# Altium PCB LTC6803-3.PcbDoc
Units mil, origin at the board's own origin, x right, y up, seen from the top; angles counter-clockwise.
Board outline 3525 x 2945 mil, 2 copper layers (Top Layer, Bottom Layer); 143 components, 115 nets, 357 pads, 26 vias.
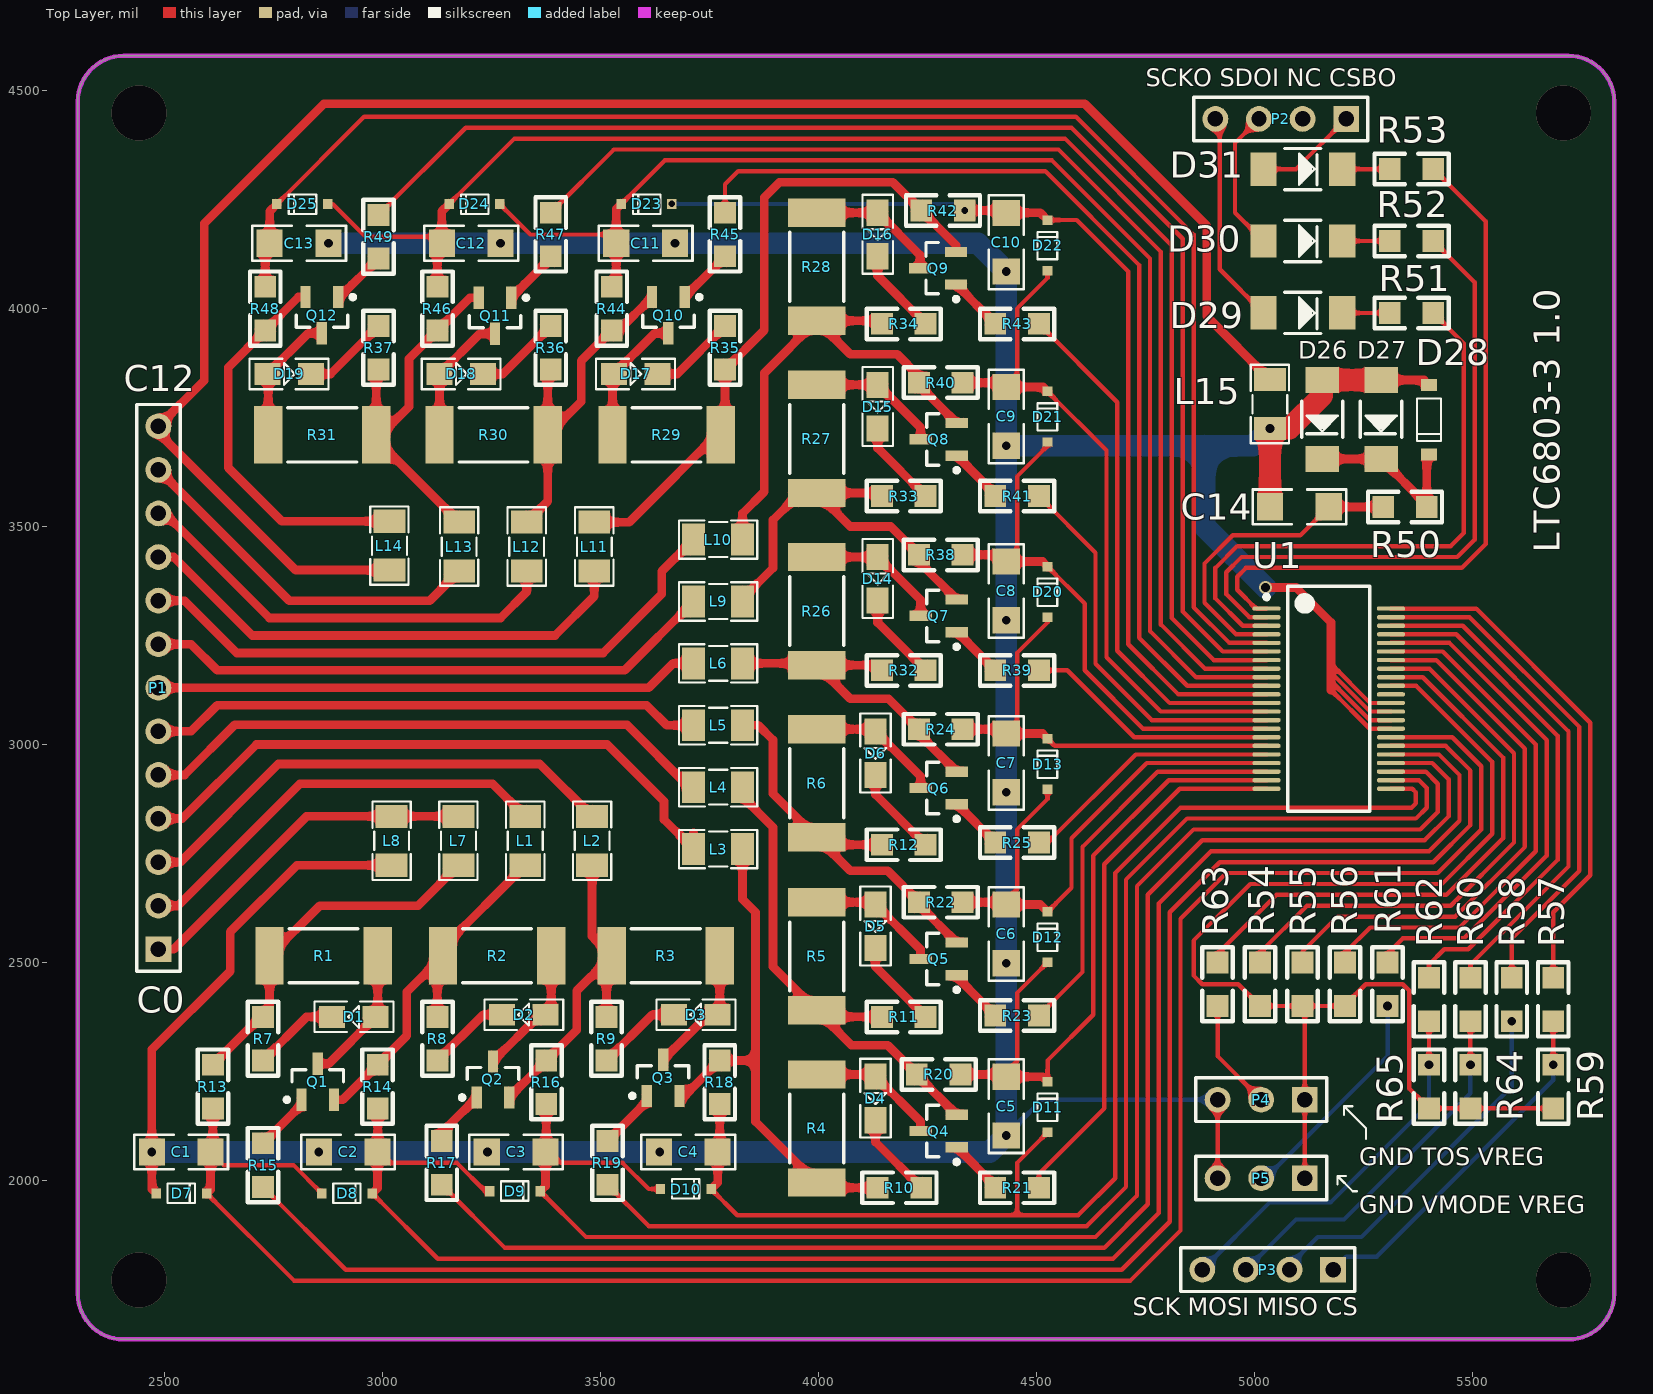
[diagram p0: Top Layer view]
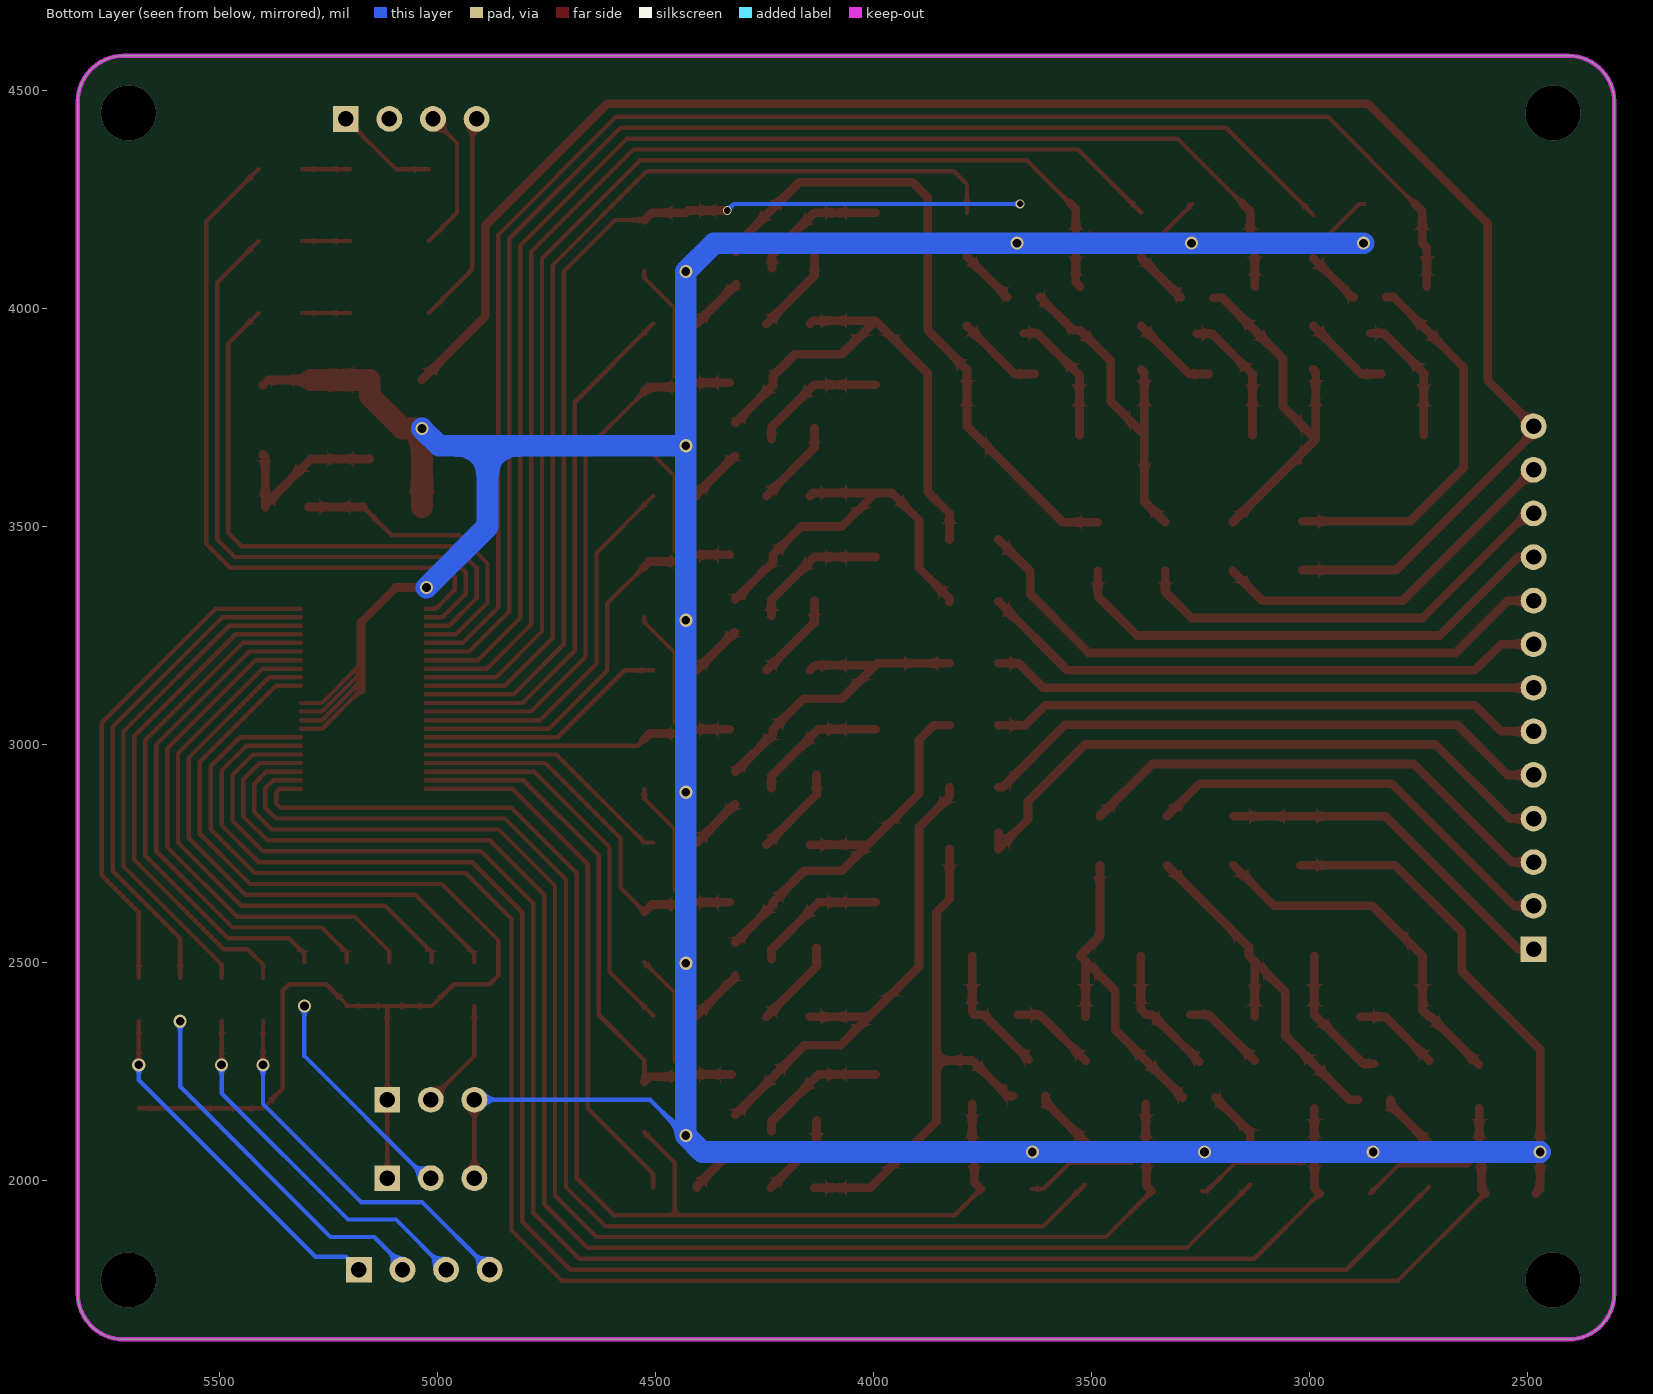
[diagram p1: Bottom Layer view, seen from below]

## Layer stack, top to bottom
Top Solder: solder mask 0.4, Solder Resist, Dk 3.5
Top Layer: signal copper 1.4
Dielectric 1: dielectric 12.6, FR-4, Dk 4.8
Bottom Layer: signal copper 1.4
Bottom Solder: solder mask 0.4, Solder Resist, Dk 3.5

## Board outline
2300,1740 2300,4475 cw(c2405,4475) 2405,4580 5720,4580 cw(c5720,4475) 5825,4475 5825,1740 cw(c5720,1740) 5720,1635 2405,1635 cw(c2405,1740)

## Design rules (kind name [scope] priority, off if disabled: settings)
Clearance [All] p1: gap=5
PolygonConnect [All] p1: connectstyle=Relief reliefconductorwidth=10 reliefentries=4 polygonreliefangle="90 Angle" airgapwidth=10
RoutingVias [All] p1: holewidth=28 width=50 viastyle="Through Hole" minholewidth=28 minwidth=50 maxholewidth=28 maxwidth=50
SolderMaskExpansion [All] p1: expansion=4
Width [All] p1: maxlimit=50 minlimit=5 preferedwidth=10
30 further rules are at their usual default settings.

## Components (designator, comment, footprint, x,y, rotation, side; value= is the part's Value field where it differs from the comment)
C1 "Cap" 1206 2604.65,2065 r180 top
C2 "Cap" 1206 2987.65,2065 r180 top
C3 "Cap" 1206 3373,2065 r180 top
C4 "Cap" 1206 3768,2065 r180 top
C5 "Cap" 1206 4430,2237.65 r270 top
C6 "Cap" 1206 4430,2632.65 r270 top
C7 "Cap" 1206 4430,3025 r270 top
C8 "Cap" 1206 4430,3419.65 r270 top
C9 "Cap" 1206 4430,3820 r270 top
C10 "Cap" 1206 4430,4219.65 r270 top
C11 "Cap" 1206 3535.35,4150 r0 top
C12 "Cap" 1206 3135.35,4150 r0 top
C13 "Cap" 1206 2740.35,4150 r0 top
C14 "Cap" 1206 5035.35,3545 r0 top
D1 "LED" LED_0805 2983,2375 r180 top
D2 "LED" LED_0805 3373,2380 r180 top
D3 "LED" LED_0805 3768,2380 r180 top
D4 "LED" LED_0805 4130,2238 r270 top
D5 "LED" LED_0805 4130,2633 r270 top
D6 "LED" LED_0805 4130,3030 r270 top
D7 "PDZ7.5B" SODFL250X110-2N 2538,1970 r0 top
D8 "PDZ7.5B" SODFL250X110-2N 2918,1970 r0 top
D9 "PDZ7.5B" SODFL250X110-2N 3303,1975 r0 top
D10 "PDZ7.5B" SODFL250X110-2N 3695,1980 r0 top
D11 "PDZ7.5B" SODFL250X110-2N 4525,2168 r90 top
D12 "PDZ7.5B" SODFL250X110-2N 4525,2558 r90 top
D13 "PDZ7.5B" SODFL250X110-2N 4525,2955 r90 top
D14 "LED" LED_0805 4135,3430 r270 top
D15 "LED" LED_0805 4135,3825 r270 top
D16 "LED" LED_0805 4135,4220 r270 top
D17 "LED" LED_0805 3530,3850 r0 top
D18 "LED" LED_0805 3130,3850 r0 top
D19 "LED" LED_0805 2735,3850 r0 top
D20 "PDZ7.5B" SODFL250X110-2N 4525,3350 r90 top
D21 "PDZ7.5B" SODFL250X110-2N 4525,3751.93 r90 top
D22 "PDZ7.5B" SODFL250X110-2N 4525,4145 r90 top
D23 "PDZ7.5B" SODFL250X110-2N 3605,4240 r180 top
D24 "PDZ7.5B" SODFL250X110-2N 3210,4240 r180 top
D25 "PDZ7.5B" SODFL250X110-2N 2815,4240 r180 top
D26 "FR107" DIO-214 5155,3836.1 r270 top
D27 "FR107" DIO-214 5290,3836.1 r270 top
D28 "CMHZ5265B" SODFL372X135-2N 5400,3745 r270 top
D29 "FR107" DIO-214 5020,3990 r0 top
D30 "FR107" DIO-214 5020,4155 r0 top
D31 "FR107" DIO-214 5020,4320 r0 top
L1 "Inductor" 0805_Inductor 3326.67,2722.8 r90 top
L2 "Inductor" 0805_Inductor 3480,2722.8 r90 top
L3 "Inductor" 0805_Inductor 3825,2760 r180 top
L4 "Inductor" 0805_Inductor 3825,2902 r180 top
L5 "Inductor" 0805_Inductor 3825,3044 r180 top
L6 "Inductor" 0805_Inductor 3825,3186 r180 top
L7 "Inductor" 0805_Inductor 3173.33,2835 r270 top
L8 "Inductor" 0805_Inductor 3020,2835 r270 top
L9 "Inductor" 0805_Inductor 3825,3328 r180 top
L10 "Inductor" 0805_Inductor 3825,3470 r180 top
L11 "Inductor" 0805_Inductor 3485,3510 r270 top
L12 "Inductor" 0805_Inductor 3330,3510 r270 top
L13 "Inductor" 0805_Inductor 3175,3510 r270 top
L14 "Inductor" 0805_Inductor 3015,3512.2 r270 top
L15 "Inductor" 0805_Inductor 5035,3725 r90 top
P1 "Header 13" HDR1X13 2485,2530 r90 top
P2 "Header 4" HDR1X4 5210,4435 r180 top
P3 "Header 4" HDR1X4 5180,1795 r180 top
P4 "Header 3" HDR1X3 5115,2185 r180 top
P5 "Header 3" HDR1X3 5115,2005 r180 top
Q1 "MOS-P" SOT23_N 2850.6,2226.34 r90 top
Q2 "MOS-P" SOT23_N 3252.6,2231.34 r90 top
Q3 "MOS-P" SOT23_N 3643,2235 r90 top
Q4 "MOS-P" SOT23_N 4275,2113 r180 top
Q5 "MOS-P" SOT23_N 4275,2508 r180 top
Q6 "MOS-P" SOT23_N 4275,2900 r180 top
Q7 "MOS-P" SOT23_N 4275,3295 r180 top
Q8 "MOS-P" SOT23_N 4275,3700 r180 top
Q9 "MOS-P" SOT23_N 4273.66,4092.6 r180 top
Q10 "MOS-P" SOT23_N 3655,3985 r270 top
Q11 "MOS-P" SOT23_N 3257.4,3983.66 r270 top
Q12 "MOS-P" SOT23_N 2860,3985 r270 top
R1 "Res" 2512-RESC6332X06N 2739.97,2515 r0 top
R2 "Res" 2512-RESC6332X06N 3138,2515 r0 top
R3 "Res" 2512-RESC6332X06N 3524.97,2515 r0 top
R4 "Res" 2512-RESC6332X06N 3995,1994.97 r90 top
R5 "Res" 2512-RESC6332X06N 3995,2389.97 r90 top
R6 "Res" 2512-RESC6332X06N 3995,2786.97 r90 top
R7 "Res" 0805 2725,2375 r270 top
R8 "Res" 0805 3125,2375 r270 top
R9 "Res" 0805 3513,2375 r270 top
R10 "Res" 0805 4135,1983 r0 top
R11 "Res" 0805 4145,2375 r0 top
R12 "Res" 0805 4145,2770 r0 top
R13 "Res" 0805 2610,2265 r270 top
R14 "Res" 0805 2988,2265 r270 top
R15 "Res" 0805 2725,2085 r270 top
R16 "Res" 0805 3375,2275 r270 top
R17 "Res" 0805 3135,2090 r270 top
R18 "Res" 0805 3773,2275 r270 top
R19 "Res" 0805 3515,2090 r270 top
R20 "Res" 0805 4225,2243 r0 top
R21 "Res" 0805 4405,1983 r0 top
R22 "Res" 0805 4230,2638 r0 top
R23 "Res" 0805 4405,2378 r0 top
R24 "Res" 0805 4230,3035 r0 top
R25 "Res" 0805 4405,2775 r0 top
R26 "Res" 2512-RESC6332X06N 3995,3181.97 r90 top
R27 "Res" 2512-RESC6332X06N 3995,3576.97 r90 top
R28 "Res" 2512-RESC6332X06N 3995,3971.97 r90 top
R29 "Res" 2512-RESC6332X06N 3775,3710 r180 top
R30 "Res" 2512-RESC6332X06N 3378.03,3710 r180 top
R31 "Res" 2512-RESC6332X06N 2985,3710 r180 top
R32 "Res" 0805 4145,3170 r0 top
R33 "Res" 0805 4145,3570 r0 top
R34 "Res" 0805 4145,3965 r0 top
R35 "Res" 0805 3785,3860 r90 top
R36 "Res" 0805 3385,3860 r90 top
R37 "Res" 0805 2990,3860 r90 top
R38 "Res" 0805 4230,3435 r0 top
R39 "Res" 0805 4405,3170 r0 top
R40 "Res" 0805 4230,3830 r0 top
R41 "Res" 0805 4405,3570 r0 top
R42 "Res" 0805 4235,4225 r0 top
R43 "Res" 0805 4405,3965 r0 top
R44 "Res" 0805 3525,3950 r90 top
R45 "Res" 0805 3785,4120 r90 top
R46 "Res" 0805 3125,3950 r90 top
R47 "Res" 0805 3385,4120 r90 top
R48 "Res" 0805 2730,3950 r90 top
R49 "Res" 0805 2990,4115 r90 top
R50 "Res" 0805 5295,3545 r0 top
R51 "Res" 0805 5410,3990 r180 top
R52 "Res" 0805 5410,4155 r180 top
R53 "Res" 0805 5410,4320 r180 top
R54 "Res" 0805 5012.5,2400 r90 top
R55 "Res" 0805 5110,2400 r90 top
R56 "Res" 0805 5207.5,2400 r90 top
R57 "Res" 0805 5685,2365 r90 top
R58 "Res" 0805 5590,2365 r90 top
R59 "Res" 0805 5685,2165 r90 top
R60 "Res" 0805 5495,2365 r90 top
R61 "Res" 0805 5305,2400 r90 top
R62 "Res" 0805 5400,2365 r90 top
R63 "Res" 0805 4915,2400 r90 top
R64 "Res" 0805 5495,2165 r90 top
R65 "Res" 0805 5400,2165 r90 top
U1 "LTC6803-3" SSOP50P780X200-44N 5170,3105 r0 top

## Footprints (in the part's own frame and the unit in brackets; to place one, negate y for a bottom-side part, rotate by r counter-clockwise, add the part's x,y. Pads: shape width x height; smd on the part's side, far side on the other; paste and mask are expansions set on the pad)
0805 [mil] "Chip Capacitor, 2-Leads, Body 2.0x1.3mm, IPC Medium Density"
  rect 50x50 smd: 1(0,0) 2(100,0)
  silkscreen extent -35,-35 135,35
0805_Inductor [mm]
  rect 1.35x1.85 smd: 1(0,0) 2(2.85,0)
  silkscreen extent -0.86,-1.12 3.71,1.12
1206 [mm]
  rect 1.52x1.6 smd: 1(0,0) 2(3.42,0)
  silkscreen extent -1.02,-1.02 4.44,1.02
2512-RESC6332X06N [mm] "Chip Resistor, 2-Leads, Body 6.3x3.2mm, IPC Medium Density"
  rect 1.65x3.35 smd: 1(0,0) 2(6.3,0)
  silkscreen extent 1.15,-1.58 5.15,1.58, body extent -0.02,-1.6 6.33,1.6, height 0.65
DIO-214 [mm] "Diode"
  rect 1.524x1.95 smd: 1(0,0) 2(4.6,0)
  silkscreen extent 1.25,-1.2 3.35,1.2, body extent 0.18,-1.2 4.42,1.19, height 3
HDR1X3 [mm] "Connector; Header; 3 Position"
  rect 1.5x1.5 hole 0.9: 1(0,0)
  round 1.5 hole 0.9: 2(2.54,0) 3(5.08,0)
  silkscreen extent -1.27,-1.27 6.35,1.27
HDR1X4 [mm] "Connector; Header; 4 Position"
  rect 1.5x1.5 hole 0.9: 1(0,0)
  round 1.5 hole 0.9: 2(2.54,0) 3(5.08,0) 4(7.62,0)
  silkscreen extent -1.27,-1.27 8.89,1.27
HDR1X13 [mm] "Connector; Header; 13 Position"
  rect 1.5x1.5 hole 0.9: 1(0,0)
  round 1.5 hole 0.9: 2(2.54,0) 3(5.08,0) 4(7.62,0) 5(10.16,0) 6(12.7,0) 7(15.24,0) 8(17.78,0) 9(20.32,0) 10(22.86,0) 11(25.4,0) 12(27.94,0) 13(30.48,0)
  silkscreen extent -1.27,-1.27 31.75,1.27
LED_0805 [mil]
  rect 60x50 smd: 1(0,0) 2(100,0)
  silkscreen extent -41,-35 140,35
SODFL250X110-2N [mm] "SODFL, 2-Leads, Body 1.25x2.50mm, IPC Medium Density"
  rect 0.55x0.6 smd: 1(-1.475,0) 2(1.475,0)
  silkscreen extent -0.81,-0.56 0.79,0.58, body extent -0.8,-0.58 0.8,0.58, height 1.1
SODFL372X135-2N [mm] "SODFL, 2-Leads, Body 1.60x3.72mm, IPC Medium Density"
  rect 0.7x0.95 smd: 1(-2.025,0) 2(2.025,0)
  silkscreen extent -1.24,-0.69 1.24,0.71, body extent -1.25,-0.7 1.25,0.7, height 1.35
SOT23_N [mm] "SOT23, 3-Leads, Body 2.9x1.3mm, Pitch 0.95mm, Lead Span 2.3mm, IPC Medium Density"
  rect 1.3x0.6 smd: 1(-1.05,0.95) 2(1.05,0) 3(-1.05,-0.95)
  silkscreen extent -1.17,-1.5 0.7,1.92, body extent -0.7,-1.5 0.7,1.5, height 1.1
SSOP50P780X200-44N [mm] "SSOP, 44-Leads, Body 12.80x5.30mm, Pitch 0.50mm, IPC Medium Density"
  oval 1.65x0.25 smd: 1(-3.625,5.25) 2(-3.625,4.75) 3(-3.625,4.25) 4(-3.625,3.75) 5(-3.625,3.25) 6(-3.625,2.75) 7(-3.625,2.25) 8(-3.625,1.75) 9(-3.625,1.25) 10(-3.625,0.75) 11(-3.625,0.25) 12(-3.625,-0.25) 13(-3.625,-0.75) 14(-3.625,-1.25) 15(-3.625,-1.75) 16(-3.625,-2.25) 17(-3.625,-2.75) 18(-3.625,-3.25) 19(-3.625,-3.75) 20(-3.625,-4.25) 21(-3.625,-4.75) 22(-3.625,-5.25) 23(3.625,-5.25) 24(3.625,-4.75) 25(3.625,-4.25) 26(3.625,-3.75) 27(3.625,-3.25) 28(3.625,-2.75) 29(3.625,-2.25) 30(3.625,-1.75) 31(3.625,-1.25) 32(3.625,-0.75) 33(3.625,-0.25) 34(3.625,0.25) 35(3.625,0.75) 36(3.625,1.25) 37(3.625,1.75) 38(3.625,2.25) 39(3.625,2.75) 40(3.625,3.25) 41(3.625,3.75) 42(3.625,4.25) 43(3.625,4.75) 44(3.625,5.25)
  silkscreen extent -3.75,-6.55 2.4,6.55, body extent -2.8,-6.55 2.8,6.55, height 2

## Part data
D26 D27 D29 D30 D31: library part 二极管
D28: "62V Zener Diode"
P1: "Header, 13-Pin"
P2 P3: "Header, 4-Pin"
P4 P5: "Header, 3-Pin"

## Via types
v1: diameter 30, hole 20, Top Layer to Bottom Layer, 20 vias
v2: diameter 125.98, hole 125.98, Top Layer to Bottom Layer, 4 vias
v3: diameter 20, hole 15, Top Layer to Bottom Layer, 2 vias

## Nets (pads, with @x,y where several pads share a name; then routed paths per layer and width w, separated by ;. In a path a pad name is that pad's centre, name@x,y a point inside that pad or via, vN(x,y) a via of type N, cw(c..) or ccw(c..) an arc to the next point about the centre after c; other vN are vias at no path point)
C0FILTER: C1.1 D7.2 D8.1 R13.2 U1.29 | length 4729.5
  Top Layer w10: D7.2 2796.07,1770 4715,1770 4830,1885 4830,2600 4935,2705 5420,2705 5520,2805 5520,2950 5453.58,3016.42 U1.29 ; C1.1 2634.65,2035 2794.93,2035 D8.1
  Top Layer w20: D7.2 2604.65,1978.57 C1.1 2610,2070.35 R13.2
C1FILTER: C2.1 D8.2 D9.1 R14.2 U1.27 | length 4164.5
  Top Layer w10: D8.2 3126.07,1820 4675,1820 4780,1925 4780,2635 4900,2755 5400,2755 5470,2825 5470,2930 5422.95,2977.05 U1.27 ; C2.1 3012.65,2040 3170,2040 3235,1975 D9.1
  Top Layer w20: D8.2 2987.65,1981.57 C2.1 2988,2065.35 R14.2
C2FILTER: C3.1 D9.2 D10.1 R16.2 U1.25 | length 3615
  Top Layer w10: D9.2 3466.07,1870 4635,1870 4730,1965 4730,2675 4860,2805 5380,2805 5420,2845 5420,2910 5392.32,2937.68 U1.25 ; C3.1@3373,2075 3408,2040 3550,2040 3610,1980 D10.1
  Top Layer w20: D9.2 3373,1986.93 C3.1 3373,2075 3375,2077 R16.2
C3FILTER: C4.1 D10.2 D11.1 R18.2 U1.23 | length 2951.2
  Top Layer w10: D10.2 3813.07,1920 4455,1920 ; D11.1 4455,2039.93 4455,1920 ; U1.23 5361.69,2898.31 5370,2890 5370,2865 5360,2855 4830,2855 4680,2705 4680,2005 4595,1920 4455,1920
  Top Layer w20: D10.2 3768,1994.93 C4.1 3768,2075 3773,2080 R18.2
C4FILTER: C5.1 D11.2 D12.1 R20.2 U1.21 | length 1536.9
  Top Layer w10: C5.1@4424.65,2243 4455,2273.35 4455,2429.93 D12.1 ; D11.2 4525,2275 4630,2380 4630,2745 4802.99,2917.99 U1.21
  Top Layer w20: R20.2 4424.65,2243 C5.1 4513.43,2237.65 D11.2
C5FILTER: C6.1 D12.2 D13.1 R22.2 U1.19 | length 1215
  Top Layer w10: C6.1@4424.65,2638 4455,2668.35 4455,2805 4525,2875 D13.1 ; D12.2 4580,2671.07 4580,2785 4752.36,2957.36 U1.19
  Top Layer w20: R22.2 4424.65,2638 C6.1 4508.43,2632.65 D12.2
C6FILTER: C7.1 D13.2 D20.1 R24.2 U1.17 | length 1019.4
  Top Layer w10: C7.1 4455,3050 4455,3210 4525,3280 D20.1 ; D13.2 4541.34,2996.73 U1.17
  Top Layer w20: R24.2 4420,3035 C7.1 4513.07,3025 D13.2
C7FILTER: C8.1 D20.2 D21.1 R38.2 U1.15 | length 1265.7
  Top Layer w10: C8.1 4455,3444.65 4455,3615 4525,3685 D21.1 ; D20.2 4610,3323.07 4610,3170 4743.9,3036.1 U1.15
  Top Layer w20: R38.2 4414.65,3435 C8.1 4513.43,3419.65 D20.2
C8FILTER: C9.1 D21.2 D22.1 R40.2 U1.13 | length 1594.3
  Top Layer w10: C9.1 4455,3845 4455,4000 4525,4070 D22.1 ; D21.2 4660,3675 4660,3200 4784.53,3075.47 U1.13
  Top Layer w20: R40.2 4420,3830 C9.1 4515,3820 D21.2
C9FILTER: C10.1 D22.2 D23.1 R42.2 U1.11 | length 2331.1
  Top Layer w10: D22.2 4591.93,4203.07 4710,4085 4710,3230 4825.16,3114.84 U1.11
  Top Layer w20: v3(4335,4225) 4424.65,4225 C10.1 4508.43,4219.65 D22.2
  Bottom Layer w10: v3(3663.07,4240) 4320,4240 v3(4335,4225)
C10FILTER: C11.1 D23.2 D24.1 R44.2 U1.9 | length 3017.4
  Top Layer w10: D24.1 3338.07,4170 3515.35,4170 C11.1 ; D23.2 3646.93,4340 4535,4340 4760,4115 4760,3260 4865.79,3154.21 U1.9
  Top Layer w20: R44.2 3535.35,4060.35 C11.1 3535.35,4228.43 D23.2
C11FILTER: C12.1 D24.2 D25.1 R46.2 U1.7 | length 3434.6
  Top Layer w10: D25.1 2885,4240 2960,4165 3120.35,4165 C12.1 ; D24.2 3301.93,4390 4565,4390 4810,4145 4810,3290 4906.42,3193.58 U1.7
  Top Layer w20: R46.2 3125,4139.65 C12.1 3135.35,4223.43 D24.2
C12FILTER: C13.1 D25.2 R48.2 U1.5 | length 3555.2
  Top Layer w10: D25.2 2956.93,4440 4590,4440 4860,4170 4860,3315 4942.05,3232.95 U1.5
  Top Layer w20: R48.2 2730,4139.65 C13.1 2740.35,4223.43 D25.2
CELL0: L7.1 L8.1 P1.1 | length 814.7
  Top Layer w20: P1.1 2520,2530 2825,2835 L8.1 L7.1
CELL1: L1.2 P1.2 | length 988.7
  Top Layer w20: P1.2 2530,2630 2810,2910 3251.67,2910 L1.2
CELL2: L2.2 P1.3 | length 1137.9
  Top Layer w20: P1.3 2535,2730 2760,2955 3360,2955 L2.2
CELL3: L3.2 P1.4 | length 1459.6
  Top Layer w20: P1.4 2540,2830 2710,3000 3515,3000 3645,2870 3645,2827.8 L3.2 3712.8,2797.2
CELL4: L4.2 P1.5 | length 1334.7
  Top Layer w20: P1.5 2545,2930 2660,3045 3560,3045 3703,2902 L4.2
CELL5: L5.2 P1.6 | length 1271.7
  Top Layer w20: P1.6 2560,3030 2620,3090 3605,3090 3651,3044 L5.2
CELL6: L6.2 P1.7 | length 1251
  Top Layer w20: P1.7 3610,3130 3666,3186 L6.2
CELL7: L9.2 P1.8 | length 1318.1
  Top Layer w20: P1.8 2560,3230 2620,3170 3554.8,3170 L9.2
CELL8: L10.2 P1.9 | length 1415.8
  Top Layer w20: P1.9 2545,3330 2665,3210 3505,3210 3640,3345 3640,3397.2 L10.2
CELL9: L11.2 P1.10 | length 1169.6
  Top Layer w20: P1.10 2520,3430 2700,3250 3395,3250 3485,3340 L11.2
CELL10: L12.2 P1.11 | length 1017.1
  Top Layer w20: P1.11 2500,3530 2740,3290 3270,3290 3330,3350 L12.2
CELL11: L13.2 P1.12 | length 842.3
  Top Layer w20: P1.12 2785,3330 3107.2,3330 L13.2
CELL12: L14.2 L15.2 P1.13 | length 4126.7
  Top Layer w20: L14.2 2800,3400 2485,3715 P1.13 2590,3835 2590,4195 2865,4470 4610,4470 4890,4190 4890,3982.2 L15.2
CS: P3.1 R57.1 R59.2 | length 820.2
  Top Layer w10: v1(5685,2265) R57.1
  Bottom Layer w10: P3.1 5210,1825 5280,1825 5685,2230 v1(5685,2265)
CSBO: D31.1 P2.1 | length 237.6
  Top Layer w10: D31.1 5095,4320 P2.1
DC1: R15.2 U1.28 | length 4017.9
  Top Layer w10: R15.2 2915,1795 4695,1795 4805,1905 4805,2615 4920,2730 5410,2730 5495,2815 5495,2940 5438.27,2996.73 U1.28
DC2: R17.2 U1.26 | length 3428.8
  Top Layer w10: R17.2 3280,1845 4655,1845 4755,1945 4755,2655 4880,2780 5390,2780 5445,2835 5445,2920 5407.64,2957.36 U1.26
DC3: R19.2 U1.24 | length 2864.7
  Top Layer w10: R19.2 3610,1895 4615,1895 4705,1985 4705,2690 4845,2830 5370,2830 5395,2855 5395,2900 5377.01,2917.99 U1.24
DC4: R21.2 U1.22 | length 1248.2
  Top Layer w10: R21.2 4505,2015 4655,2165 4655,2725 4828.31,2898.31 U1.22
DC5: R23.2 U1.20 | length 922.2
  Top Layer w10: R23.2 4605,2478 4605,2765 4777.68,2937.68 U1.20
DC6: R25.2 U1.18 | length 606
  Top Layer w10: R25.2 4525,2775 4727.05,2977.05 U1.18
DC7: R39.2 U1.16 | length 585.9
  Top Layer w10: R39.2 4570,3170 4723.58,3016.42 U1.16
DC8: R41.2 U1.14 | length 884.7
  Top Layer w10: R41.2 4635,3440 4635,3185 4764.21,3055.79 U1.14
DC9: R43.2 U1.12 | length 1216.5
  Top Layer w10: R43.2 4685,3785 4685,3215 4804.84,3095.16 U1.12
DC10: R45.2 U1.10 | length 2309.5
  Top Layer w10: R45.2 3785,4285 3815,4315 4520,4315 4735,4100 4735,3245 4845.47,3134.53 U1.10
DC11: R47.2 U1.8 | length 2696.6
  Top Layer w10: R47.2 3530,4365 4550,4365 4785,4130 4785,3275 4886.1,3173.9 U1.8
DC12: R49.2 U1.6 | length 3118.7
  Top Layer w10: R49.2 3190,4415 4580,4415 4835,4160 4835,3305 4926.73,3213.27 U1.6
GND: C1.2 C2.2 C3.2 C4.2 C5.2 C6.2 C7.2 C8.2 C9.2 C10.2 C11.2 C12.2 C13.2 C14.1 D7.1 D26.1 D27.1 D28.1 L8.2 L15.1 P4.3 P5.3 U1.30 U1.31 U1.32 U1.33 | length 10006.1
  Top Layer w10: P5.3 P4.3 ; 5175,3125 5263.9,3036.1 U1.30 ; 5175,3145 5264.21,3055.79 U1.31 ; 5175,3185 5264.84,3095.16 U1.33 ; 5177.5,3162.5 5264.53,3075.47 U1.32
  Top Layer w20: D7.1 2470,1979.93 v1(2470,2065) 2470,2300 2650,2480 2650,2570 2802.8,2722.8 L8.2 ; v1(5025,3360) 5095,3360 5175,3280 5175,3185 5175,3145 5175,3125 ; D27.1 5388.62,3836.1 D28.1
  Top Layer w50: C14.1 5035.35,3724.65 v1(5035,3725) 5080,3725 5155,3800 D26.1 D27.1
  Bottom Layer w10: v1(4430,2103) 4512,2185 P4.3
  Bottom Layer w50: v1(2470,2065) v1(2853,2065) v1(3240,2065) v1(3635,2065) 4392,2065 v1(4430,2103) v1(4430,2498) v1(4430,2890.35) v1(4430,3285) v1(4430,3685.35) ; v1(2875,4150) v1(3270,4150) v1(3670,4150) 4365,4150 v1(4430,4085) v1(4430,3685.35) ; v1(5025,3360) 4885,3500 4885,3685.35 ; v1@5035.35,3724.65 4996.06,3685.35 4885,3685.35 ; v1(4430,3685.35) 4885,3685.35
MISO: P3.2 R58.1 | length 839.8
  Bottom Layer w10: P3.2 5080,1805 5145,1870 5245,1870 5590,2215 v1(5590,2365)
MOSI: P3.3 R60.1 R64.2 | length 847.8
  Top Layer w10: v1(5495,2265) R60.1
  Bottom Layer w10: P3.3 5095,1910 5205,1910 5495,2200 v1(5495,2265)
NetC14_2: C14.2 R50.1 U1.4 | length 726.1
  Top Layer w10: U1.4 4957.36,3252.64 4885,3325 4885,3415 4950,3480 5105,3480 C14.2
  Top Layer w20: C14.2 R50.1
NetD1_1: D1.1 Q1.2 R1.2 | length 318.9
  Top Layer w20: Q1.2 2875.68,2267.68 D1.1 2988,2380 R1.2
NetD1_2: D1.2 R7.2 | length 199.4
  Top Layer w20: R7.2 2825,2375 D1.2
NetD2_1: D2.1 Q2.2 R2.2 | length 305.3
  Top Layer w20: Q2.2 3359.92,2380 D2.1 3386.03,2393.03 R2.2
NetD2_2: D2.2 R8.2 | length 191.5
  Top Layer w20: R8.2 3230,2380 D2.2
NetD3_1: D3.1 Q3.2 R3.2 | length 305
  Top Layer w20: Q3.2 3746.66,2380 D3.1 3773,2385 R3.2
NetD3_2: D3.2 R9.2 | length 198.5
  Top Layer w20: R9.2 3618,2380 D3.2
NetD4_1: D4.1 Q4.2 R4.2 | length 305
  Top Layer w20: R4.2 4125,2243 D4.1 4233.66,2134.34 Q4.2
NetD4_2: D4.2 R10.2 | length 198.5
  Top Layer w20: D4.2 4130,2088 R10.2
NetD5_1: D5.1 Q5.2 R5.2 | length 305
  Top Layer w20: R5.2 4125,2638 D5.1 4233.66,2529.34 Q5.2
NetD5_2: D5.2 R11.2 | length 205.6
  Top Layer w20: D5.2 4130,2490 R11.2
NetD6_1: D6.1 Q6.2 R6.2 | length 310
  Top Layer w20: R6.2 4125,3035 D6.1 4233.66,2926.34 Q6.2
NetD6_2: D6.2 R12.2 | length 207.6
  Top Layer w20: D6.2 4130,2885 R12.2
NetD14_1: D14.1 Q7.2 R26.2 | length 315.9
  Top Layer w20: R26.2 D14.1 4233.66,3331.34 Q7.2
NetD14_2: D14.2 R32.2 | length 205.6
  Top Layer w20: D14.2 4135,3280 R32.2
NetD15_1: D15.1 Q8.2 R27.2 | length 305.9
  Top Layer w20: R27.2 D15.1 4233.66,3726.34 Q8.2
NetD15_2: D15.2 R33.2 | length 200.6
  Top Layer w20: D15.2 4135,3680 R33.2
NetD16_1: D16.1 Q9.2 R28.2 | length 307.7
  Top Layer w20: R28.2 D16.1 4232.32,4122.68 Q9.2
NetD16_2: D16.2 R34.2 | length 200.6
  Top Layer w20: D16.2 4135,4075 R34.2
NetD17_1: D17.1 Q10.2 R29.2 | length 305.1
  Top Layer w20: R29.2 3526.97,3846.97 D17.1 3623.66,3943.66 Q10.2
NetD17_2: D17.2 R35.2 | length 200.6
  Top Layer w20: D17.2 3675,3850 R35.2
NetD18_1: D18.1 Q11.2 R30.2 | length 305.6
  Top Layer w20: R30.2 D18.1 3222.32,3942.32 Q11.2
NetD18_2: D18.2 R36.2 | length 200.6
  Top Layer w20: D18.2 3275,3850 R36.2
NetD19_1: D19.1 Q12.2 R31.2 | length 304.6
  Top Layer w20: R31.2 2736.97,3848.03 D19.1 2828.66,3943.66 Q12.2
NetD19_2: D19.2 R37.2 | length 200.6
  Top Layer w20: D19.2 2880,3850 R37.2
NetD26_2: D26.2 D27.2 D28.2 R50.2 | length 405.8
  Top Layer w20: D26.2 D27.2 R50.2@5395,3550 ; R50.2 R50.2@5395,3550 ; D28.2 5395,3660.28 R50.2@5395,3550
NetD29_2: D29.2 R51.2 | length 108.9
  Top Layer w10: D29.2 R51.2
NetD30_2: D30.2 R52.2 | length 108.9
  Top Layer w10: D30.2 R52.2
NetD31_2: D31.2 R53.2 | length 108.9
  Top Layer w10: D31.2 R53.2
NetL1_1: L1.1 Q1.3 R2.1 R8.1 R14.1 | length 858.2
  Top Layer w20: Q1.3 2908,2185 R14.1 3055,2332 3055,2432 R2.1@3125,2502 ; R8.1 R2.1@3125,2502 ; L1.1 3138,2534.13 R2.1 R2.1@3125,2502
NetL2_1: L2.1 Q2.3 R3.1 R9.1 R16.1 | length 776.8
  Top Layer w20: Q2.3 R16.1 3445,2345 3445,2435.03 R3.1@3513,2503.03 ; L2.1 3480,2559.97 R3.1 R3.1@3513,2503.03 ; R9.1 R3.1@3513,2503.03
NetL3_1: L3.1 Q3.3 R4.1 R10.1 R18.1 | length 1188.7
  Top Layer w20: Q3.3 3691.66,2193.66 R18.1 3855,2275 ; L3.1 3825,2645 3855,2615 3855,2275 ; R10.1 4006.97,1983 R4.1 3855,2134.97 3855,2275
NetL4_1: L4.1 Q4.3 R5.1 R11.1 R20.1 | length 1138.8
  Top Layer w20: L4.1 3825,2880 3895,2810 3895,2489.97 R5.1 R5.1@4009.97,2375 ; R11.1 R5.1@4009.97,2375 ; Q4.3 4225,2241.74 R20.1 4158,2310 4074.97,2310 R5.1@4009.97,2375
NetL5_1: L5.1 Q5.3 R6.1 R12.1 R22.1 | length 906.6
  Top Layer w20: L5.1 3861,3044 3895,3010 3895,2886.97 R6.1 R6.1@4011.97,2770 ; R12.1 R6.1@4011.97,2770 ; Q5.3 4230,2631.74 R22.1 4158,2710 4071.97,2710 R6.1@4011.97,2770
NetL6_1: L6.1 Q6.3 R24.1 R26.1 R32.1 | length 755.9
  Top Layer w20: L6.1 3990.97,3186 R26.1 ; R32.1 4133.03,3181.97 R26.1 ; Q6.3 4230,3023.74 R24.1 4160,3105 4071.97,3105 R26.1
NetL7_2: L7.2 R1.1 R7.1 R13.1 | length 826.2
  Top Layer w20: R13.1 2720,2375 R7.1 2739.97,2389.97 R1.1 2854.97,2630 3080.54,2630 L7.2
NetL9_1: L9.1 Q7.3 R27.1 R33.1 R38.1 | length 926.7
  Top Layer w20: L9.1 3825,3335 3895,3405 3895,3515 3956.97,3576.97 R27.1 ; R33.1 4138.03,3576.97 R27.1 ; Q7.3 4230,3418.74 R38.1 4165,3500 4071.97,3500 R27.1
NetL10_1: L10.1 Q8.3 R28.1 R34.1 R40.1 | length 1156.2
  Top Layer w20: L10.1 3825,3530 3875,3580 3875,3851.97 R28.1 ; R34.1 4138.03,3971.97 R28.1 ; Q8.3 4230,3823.74 R40.1 4230,3845 4180,3895 4071.97,3895 R28.1
NetL11_1: L11.1 Q9.3 R29.1 R35.1 R42.1 | length 1483
  Top Layer w20: L11.1 3565,3510 3785,3730 R35.1 3875,3950 3875,4255 3910,4290 4170,4290 R42.1 4315,4145 Q9.3
NetL12_1: L12.1 Q10.3 R30.1 R36.1 R44.1 | length 797.9
  Top Layer w20: L12.1 3378.03,3558.03 R30.1 ; R36.1 3378.03,3853.03 R30.1 ; Q10.3 3541.26,3950 R44.1 3455,3880 3455,3786.97 R30.1
NetL13_1: L13.1 Q11.3 R31.1 R37.1 R46.1 | length 854.8
  Top Layer w20: R31.1 2985,3855 R37.1 ; L13.1 2985,3700 3060,3775 3060,3885 R46.1 3200,4025 Q11.3
NetL14_1: L14.1 Q12.3 R48.1 | length 895.3
  Top Layer w20: Q12.3 2806.34,4026.34 R48.1 2645,3865 2645,3635 2767.8,3512.2 L14.1
NetP4_2: P4.2 R63.1 | length 256.4
  Top Layer w10: R63.1 4915,2285 P4.2
NetP5_2: P5.2 R61.1 | length 521
  Bottom Layer w10: P5.2 5025,2005 5305,2285 v1(5305,2400)
NetQ1_1: Q1.1 R15.1 | length 136.5
  Top Layer w20: R15.1 2813.2,2173.2 Q1.1
NetQ2_1: Q2.1 R17.1 | length 133.2
  Top Layer w20: R17.1 3135,2109.8 Q2.1
NetQ3_1: Q3.1 R19.1 | length 141.2
  Top Layer w20: R19.1 3605.6,2180.6 Q3.1
NetQ4_1: Q4.1 R21.1 | length 129.3
  Top Layer w20: Q4.1 4405,1986.94 R21.1
NetQ5_1: Q5.1 R23.1 | length 129.3
  Top Layer w20: Q5.1 4316.34,2466.66 R23.1
NetQ6_1: Q6.1 R25.1 | length 124.9
  Top Layer w20: Q6.1 4317.4,2862.6 R25.1
NetQ7_1: Q7.1 R39.1 | length 124.9
  Top Layer w20: Q7.1 4317.4,3257.6 R39.1
NetQ8_1: Q8.1 R41.1 | length 129.3
  Top Layer w20: Q8.1 4405,3573.94 R41.1
NetQ9_1: Q9.1 R43.1 | length 127.5
  Top Layer w20: Q9.1 4405,3965.2 R43.1
NetQ10_1: Q10.1 R45.1 | length 132
  Top Layer w20: Q10.1 3785,4118.94 R45.1
NetQ11_1: Q11.1 R47.1 | length 132.4
  Top Layer w20: Q11.1 3385,4115.2 R47.1
NetQ12_1: Q12.1 R49.1 | length 129.3
  Top Layer w20: Q12.1 2901.34,4026.34 R49.1
NetR51_1: R51.1 U1.3 | length 1350.4
  Top Layer w10: U1.3 4972.68,3272.32 4910,3335 4910,3405 4960,3455 5450,3455 5480,3485 5480,3920 R51.1
NetR52_1: R52.1 U1.2 | length 1489.6
  Top Layer w10: U1.2 4987.99,3292.01 4935,3345 4935,3395 4970,3430 5465,3430 5505,3470 5505,4060 R52.1
NetR53_1: R53.1 U1.1 | length 1626
  Top Layer w10: U1.1 5003.31,3311.69 4960,3355 4960,3385 4980,3405 5475,3405 5530,3460 5530,4200 R53.1
NetR54_2: R54.2 U1.37 | length 1277.2
  Top Layer w10: R54.2 5012.5,2522.5 5120,2630 5450,2630 5595,2775 5595,2980 5401.1,3173.9 U1.37
NetR55_2: R55.2 U1.38 | length 1251
  Top Layer w10: R55.2 5110,2525 5190,2605 5460,2605 5620,2765 5620,2990 5416.42,3193.58 U1.38
NetR56_2: R56.2 U1.39 | length 1221.9
  Top Layer w10: R56.2 5207.5,2522.5 5265,2580 5470,2580 5645,2755 5645,3000 5431.73,3213.27 U1.39
NetR57_2: R57.2 U1.44 | length 1185.9
  Top Layer w10: U1.44 5508.31,3311.69 5770,3050 5770,2700 5685,2615 R57.2
NetR58_2: R58.2 U1.43 | length 1175.9
  Top Layer w10: U1.43 5492.99,3292.01 5745,3040 5745,2710 5590,2555 R58.2
NetR60_2: R60.2 U1.42 | length 1165.9
  Top Layer w10: U1.42 5477.68,3272.32 5720,3030 5720,2720 5495,2495 R60.2
NetR61_2: R61.2 U1.40 | length 1192.8
  Top Layer w10: R61.2 5305,2520 5340,2555 5480,2555 5670,2745 5670,3010 5447.05,3232.95 U1.40
NetR62_2: R62.2 U1.41 | length 1188.1
  Top Layer w10: U1.41 5462.36,3252.64 5695,3020 5695,2735 5490,2530 5435,2530 5400,2495 R62.2
NetR63_2: R63.2 U1.36 | length 1303.4
  Top Layer w10: R63.2 4915,2520 5050,2655 5440,2655 5570,2785 5570,2970 5385.79,3154.21 U1.36
SCK: P3.4 R62.1 R65.2 | length 867.4
  Top Layer w10: v1(5400,2265) R62.1
  Bottom Layer w10: P3.4 5035,1950 5175,1950 5400,2175 v1(5400,2265)
SCKO: D29.1 P2.4 | length 490.6
  Top Layer w10: P2.4 4920,4425 4920,4090 D29.1
SDOI: D30.1 P2.3 | length 329.7
  Top Layer w10: P2.3 4955,4380 4955,4220 D30.1
VREG: P4.1 P5.1 R54.1 R55.1 R56.1 R59.1 R64.1 R65.1 U1.35 | length 2859.2
  Top Layer w10: P5.1 P4.1 5115,2395 R55.1 ; U1.35 5370.47,3134.53 5545,2960 5545,2795 5430,2680 4990,2680 4860,2550 4860,2470 4880,2450 4962.5,2450 R54.1 R55.1 ; R59.1 R64.1 R65.1 5355,2210 5355,2435 5340,2450 5255,2450 5207.5,2402.5 R56.1 R55.1
pads on no net: P2.2 U1.34
copper on no net:
  other v2: 2440.94,1771.65 5708.66,1771.65 2440.94,4448.82 5708.66,4448.82

## Keep-outs
Keep-Out Layer:
  the board outline again, w10

## Silkscreen, mask and mechanical layers (free items; w line width, h text height)
Top Overlay:
  lines w4.72: 5190,1990 5190,2010 ; 5205,2150 5205,2170 ; 5210,2010 5190,2010 ; 5225,2170 5205,2170 ; 5235,1975 5225,1975 5190,2010 ; 5255,2095 5255,2120 5205,2170
  text "SCKO SDOI NC CSBO" at 4750,4510 h40
  text "C12" at 2405,3810 h60
  text "LTC6803-3 1.0" at 5700,3440 h60 r90
  text "C0" at 2435,2385 h60
  text "GND TOS VREG" at 5240,2035 h40
  text "GND VMODE VREG" at 5240,1925 h40
  text "SCK MOSI MISO CS" at 4720,1690 h40